# EAGLE board leptanie_tl.dole (EAGLE 9.5.2)
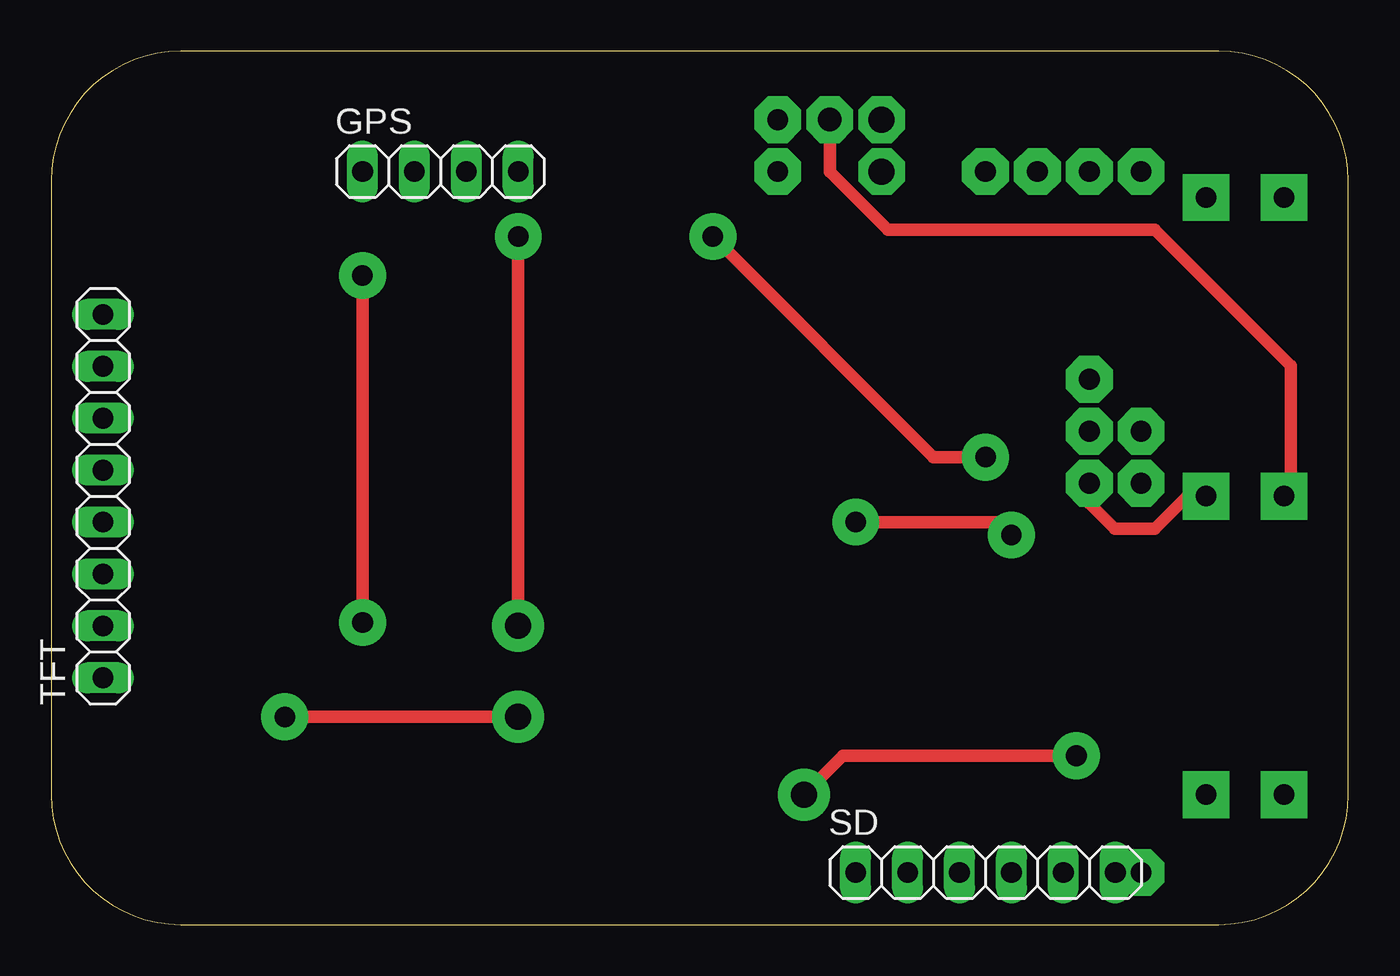
[diagram p0: board, top side]
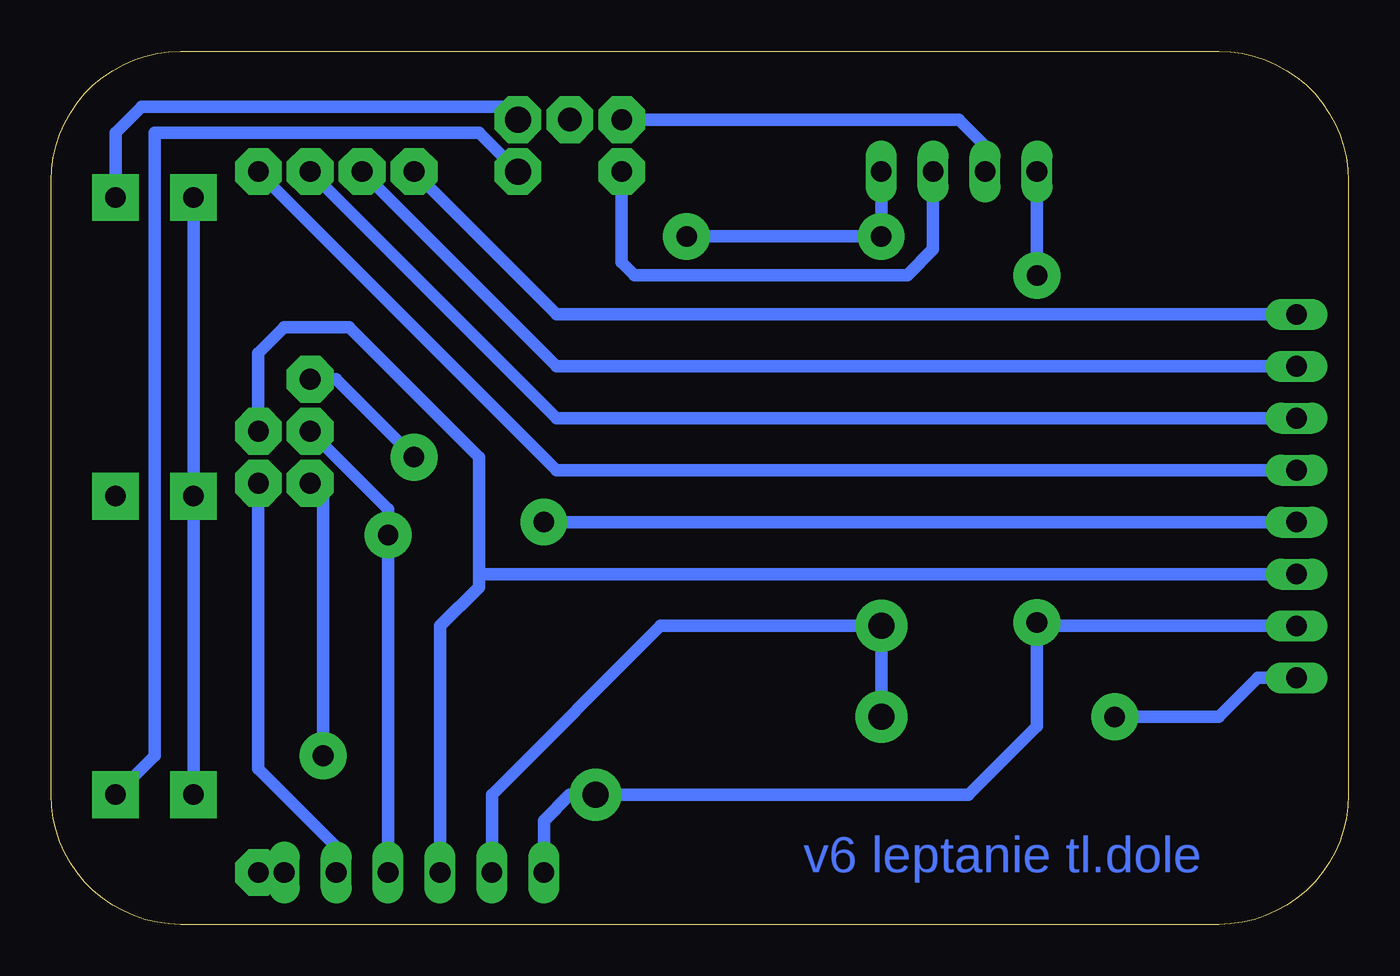
[diagram p1: board, bottom side, seen from below]

Size 63.48 x 42.72 mm. Coordinates in mm from the lower left corner, seen from the top.
Outline: 0,36.37 0,6.35 arc90 6.35,0 57.13,0 arc90 63.48,6.35 63.48,36.37 arc90 57.13,42.72 6.35,42.72 arc90 0,36.37
Copper layers (1*16): Top 0.035mm / dielectric 1.5mm / Bottom 0.035mm
Design rules "default": minimum track width 6mil, minimum drill 0.35mm, track to track 6mil, track to pad 6mil, pad to pad 6mil, via to via 6mil, smd to smd 6mil, copper to edge 40mil, drill to drill 6mil, minimum pad ring 10mil, minimum via ring 8mil, stop-mask expansion 4mil, vias tented up to drill 0mil, thermal gap 10mil

## Footprints (pad centres in the part's own frame; a part is rotated, then mirrored left to right if it is on the bottom)
1X04 = drill 1.016 long: 1 -3.81,0; 2 -1.27,0; 3 1.27,0; 4 3.81,0
1X06 = drill 1.016 long: 1 -6.35,0; 2 -3.81,0; 3 -1.27,0; 4 1.27,0; 5 3.81,0; 6 6.35,0
1X08 = drill 1.016 long: 1 -8.89,0; 2 -6.35,0; 3 -3.81,0; 4 -1.27,0; 5 1.27,0; 6 3.81,0; 7 6.35,0; 8 8.89,0

## Placement (x,y rotation side)
GPS  [1X04]  19.05,36.83 0 top
SD  [1X06]  45.72,2.54 0 top
TFT  [1X08]  2.54,20.95 90 top

## Library data of the parts
GPS SD TFT = pinhead

## Nets
MOSI: SD.4 TFT.4
N$1: SD.6
N$2: SD.5
N$3: TFT.5
N$4: SD.3 TFT.3
N$5: GPS.4 SD.2 TFT.1
N$6: TFT.6
N$7: GPS.2
N$8: GPS.3
N$9: TFT.7
N$10: TFT.8
S: GPS.1 SD.1 TFT.2

## Tracks (layer width: path | path; a pad name or v marks a point on that pad's centre or on a via)
MOSI  (via drill 1 pad 2.29, 1.02 pad 2.29)
  Top 0.61: v46.99,19.05 46.35,19.69 v39.37,19.69
  Bottom 0.61: v39.37,19.69 TFT.4 | v50.8,24.13 46.99,20.32 v46.99,19.05 SD.4
N$1  (via drill 1.02 pad 2.29)
  Bottom 0.61: SD.6 v53.34,2.54
N$2  (via drill 1.02 pad 2.29)
  Bottom 0.61: SD.5 49.53,3.81 53.34,7.62 v53.34,21.59
N$3  (via drill 1.02 pad 2.29)
  Bottom 0.61: TFT.5 38.73,22.23 v53.34,36.83
N$4  (via drill 1.02 pad 2.29)
  Bottom 0.61: 42.54,17.15 42.54,16.51 44.45,14.61 SD.3 | 42.54,17.15 42.54,22.86 48.9,29.21 52.07,29.21 53.34,27.94 v53.34,24.13 | 42.54,17.15 TFT.3
N$5  (via drill 1 pad 2.29, 1.02 pad 2.29, 1.27 pad 2.54)
  Top 0.61: v22.86,10.16 v11.43,10.16 | v22.86,33.66 v22.86,14.61 | v45.72,22.86 43.18,22.86 v32.38,33.66
  Bottom 0.61: v45.72,22.86 49.53,26.67 v50.8,26.67 | GPS.4 v22.86,33.66 v32.38,33.66 | SD.2 41.91,6.35 33.65,14.61 v22.86,14.61 v22.86,10.16 | v11.43,10.16 6.35,10.16 4.45,12.07 TFT.1
N$6  (via drill 1.02 pad 2.29)
  Bottom 0.61: TFT.6 38.73,24.77 v50.8,36.83
N$7  (via drill 1.02 pad 2.29)
  Bottom 0.61: GPS.2 17.78,38.1 19.05,39.37 v35.56,39.37
N$8  (via drill 1.02 pad 2.29)
  Bottom 0.61: GPS.3 20.32,33.02 21.59,31.75 34.93,31.75 35.56,32.39 v35.56,36.83
N$9  (via drill 1.02 pad 2.29)
  Bottom 0.61: TFT.7 38.73,27.31 v48.26,36.83
N$10  (via drill 1.02 pad 2.29)
  Bottom 0.61: TFT.8 38.73,29.84 v45.72,36.83
N$11  (via drill 1 pad 2.29, 1.27 pad 2.29)
  Bottom 0.61: v40.64,39.37 41.27,40 59.05,40 60.32,38.73 v60.32,35.56
N$15  (via drill 1 pad 2.29, 1.14 pad 2.29)
  Top 0.61: v38.1,39.37 38.1,36.83 40.95,33.98 54,33.98 60.65,27.33 60.65,21.29 v60.32,20.95
N$18  (via drill 1 pad 2.29, 1.27 pad 2.29)
  Bottom 0.61: v40.64,36.83 42.54,38.73 58.42,38.73 58.42,8.26 v60.32,6.35
S  (via drill 1 pad 2.29, 1.02 pad 2.29, 1.27 pad 2.54)
  Top 0.61: v36.83,6.35 38.73,8.26 v50.16,8.26 | v15.24,31.75 v15.24,14.77 | v50.8,21.59 50.8,20.6 52.04,19.36 54,19.36 55.6,20.95 v56.51,20.95
  Bottom 0.61: GPS.1 v15.24,31.75 | SD.1 39.37,5.08 38.1,6.35 v36.83,6.35 18.58,6.35 15.24,9.69 v15.24,14.77 15.24,14.61 TFT.2 | v50.16,8.26 50.16,20.95 v50.8,21.59 | v56.51,35.56 v56.51,20.95 v56.51,6.35

## Text on the board
Bottom: v6 leptanie tl.dole